# EAGLE board ftdi1 (EAGLE 6.5.0)
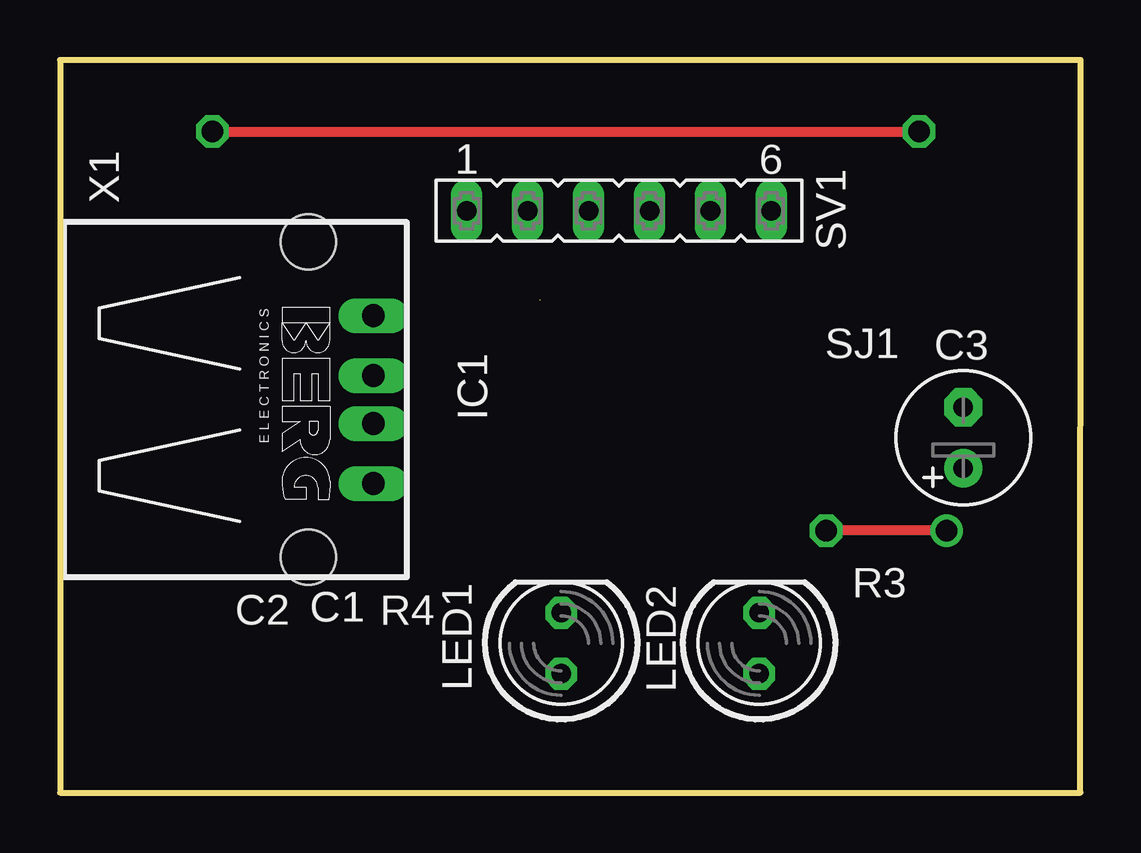
[diagram p0: board, top side]
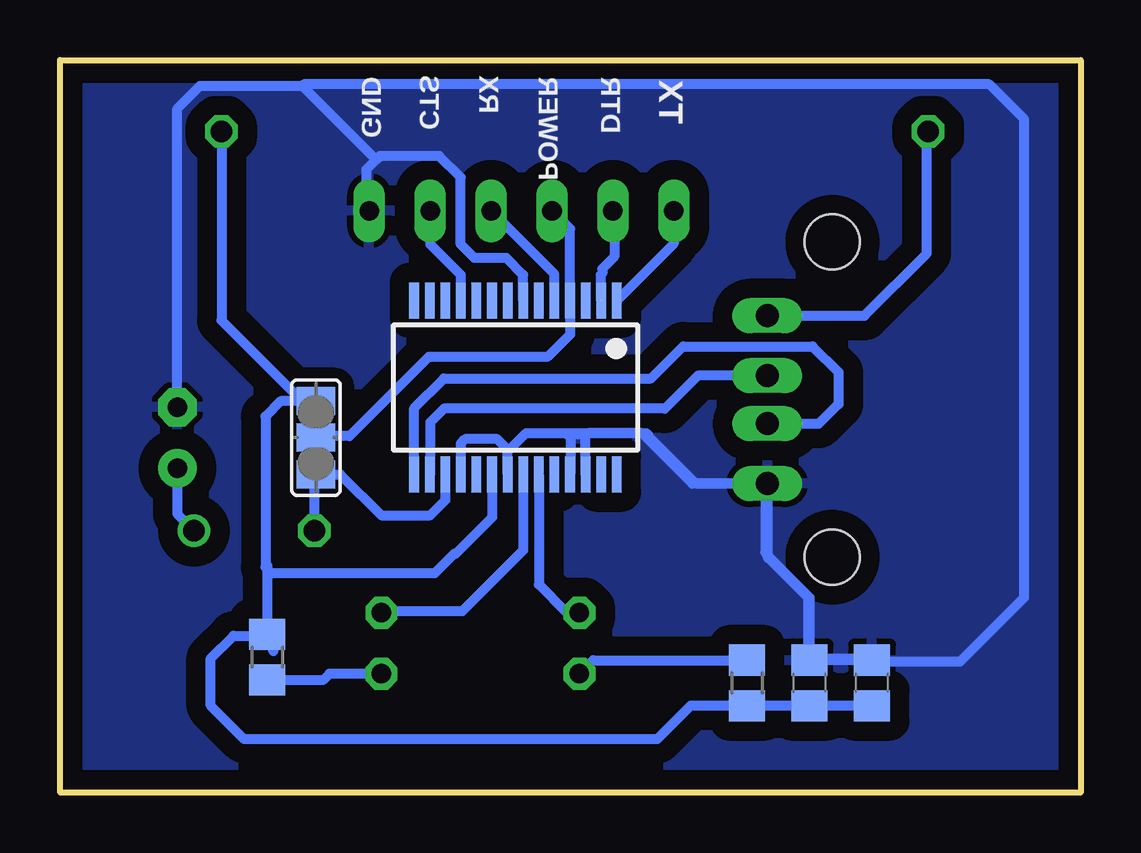
[diagram p1: board, bottom side, seen from below]

Size 42.55 x 30.54 mm. Coordinates in mm from the lower left corner, seen from the top.
Outline: 0,0 42.53,0 42.55,30.54 0,30.54 0,0
Copper layers (1*16): Top 0.035mm / dielectric 1.5mm / Bottom 0.035mm
Design rules "default *": minimum track width 10mil, minimum drill 24mil, track to track 8mil, track to pad 8mil, pad to pad 8mil, via to via 8mil, smd to smd 8mil, copper to edge 12mil, drill to drill 8mil, minimum pad ring 10mil, minimum via ring 8mil, stop-mask expansion 4mil, vias tented up to drill 0mil, thermal gap 10mil

## Footprints (pad centres in the part's own frame; a part is rotated, then mirrored left to right if it is on the bottom)
C0805 = smd 1.3 x 1.5: 1 -0.95,0; 2 0.95,0
E2,5-6 = drill 0.813 pad 1.6: + -1.27,0 | drill 0.813 pad 1.6 octagon: - 1.27,0
SSOP28 = smd 0.4 x 1.5: 1 -4.225,-3.625; 2 -3.575,-3.625; 3 -2.925,-3.625; 4 -2.275,-3.625; 5 -1.625,-3.625; 6 -0.975,-3.625; 7 -0.325,-3.625; 8 0.325,-3.625; 9 0.975,-3.625; 10 1.625,-3.625; 11 2.275,-3.625; 12 2.925,-3.625; 13 3.575,-3.625; 14 4.225,-3.625; 15 4.225,3.625; 16 3.575,3.625; 17 2.925,3.625; 18 2.275,3.625; 19 1.625,3.625; 20 0.975,3.625; 21 0.325,3.625; 22 -0.325,3.625; 23 -0.975,3.625; 24 -1.625,3.625; 25 -2.275,3.625; 26 -2.925,3.625; 27 -3.575,3.625; 28 -4.225,3.625
LED5MM = drill 0.813 octagon: A -1.27,0; K 1.27,0
R0805 = smd 1.3 x 1.5: 1 -0.95,0; 2 0.95,0
SJ_2 = smd 1.168 x 1.6: 1 -1.524,0; 2 0,0; 3 1.524,0
FE06 = drill 0.813 long: 1 -6.35,0; 2 -3.81,0; 3 -1.27,0; 4 1.27,0; 5 3.81,0; 6 6.35,0
PN87520 = drill 0.95 long: 1 -3.5,2.71; 2 -1,2.71; 3 1,2.71; 4 3.5,2.71 | hole 2.3: -6.57,0; 6.57,0

## Placement (x,y rotation side)
C1  10nF  [C0805]  11.3,4.57 90 bottom
C2  10nF  [C0805]  8.7,4.57 90 bottom
C3  10uF  [E2,5-6]  37.66,14.8 90 top
IC1  FT232RL  [SSOP28]  23.56,16.89 180 bottom
LED1  Yellow  [LED5MM]  20.89,6.22 90 top
LED2  Green  [LED5MM]  29.15,6.22 90 top
R3  390R  [R0805]  33.91,5.65 90 bottom
R4  390R  [R0805]  13.91,4.57 270 bottom
SJ1  [SJ_2]  31.88,14.8 270 bottom
SV1  [FE06]  23.3,24.26 0 top
X1  [PN87520]  10.35,16.38 270 top

## Library data of the parts
C1-C3 R3 R4 = rcl
IC1 = ftdichip; MPN: FT232RL; OC_FARNELL: 1146032; OC_NEWARK: 91K9918
LED1 LED2 = led
SJ1 = jumper
SV1 = con-lsta; OC_FARNELL: unknown; OC_NEWARK: unknown
X1 = con-berg; OC_FARNELL: unknown; OC_NEWARK: unknown

## Nets
3.3V: C3.+ IC1.17 SJ1.3
CTS: IC1.11 SV1.5
DTR: IC1.2 SV1.2
GND: C1.2 C2.2 C3.- IC1.7 IC1.18 IC1.21 IC1.25 IC1.26 SV1.6 X1.4
N$1: IC1.23 LED1.K
N$2: IC1.22 LED2.K
N$3: LED2.A R3.1
N$4: LED1.A R4.1
N$7: IC1.16 X1.2
N$8: IC1.15 X1.3
POWER: IC1.4 SJ1.2 SV1.3
RX: IC1.5 SV1.4
TX: IC1.1 SV1.1
VCC: C1.1 C2.1 IC1.20 R3.2 R4.2 SJ1.1 X1.1

## Tracks (layer width: path | path; a pad name or v marks a point on that pad's centre or on a via)
3.3V  (via drill 0.9)
  Top 0.406: v36.96,10.92 v31.94,10.92
  Bottom 0.406: IC1.17 26.48,12.19 27.11,11.56 29.15,11.56 30.86,13.27 SJ1.3 31.94,13.21 v31.94,10.92 | C3.+ 37.66,11.62 v36.96,10.92
CTS
  Bottom 0.406: SV1.5 27.11,22.86 25.84,21.59 25.84,20.53 IC1.11
DTR  (1 unrouted)
  Bottom 0.406: SV1.2 19.43,24.26 19.43,22.35 19.94,21.84 19.94,21.65 20,21.59 20,20.54
GND
  Bottom 0.406: 21.46,14.99 23.11,14.99 23.88,14.22 IC1.21 23.88,14.29 24.32,14.73 25.65,14.73 25.84,14.54 25.84,13.28 IC1.18 | 21.46,14.99 21.27,14.8 | 21.27,14.8 IC1.25 | IC1.26 20.63,14.86 20.57,14.92 | 20.57,14.92 21.14,14.92 21.27,14.8 | IC1.7 23.23,21.58 23.94,22.29 25.27,22.29 25.84,22.86 25.84,25.65 26.73,26.54 29.21,26.54 29.37,26.38 | 29.37,26.38 29.78,25.97 29.78,24.38 SV1.6 | 20.57,14.92 20.51,14.99 18.29,14.99 16.18,12.88 X1.4 13.06,9.89 11.3,8.13 C1.2 C2.2 | C3.- 37.66,28.51 36.7,29.46 32.45,29.46 | 32.45,29.46 29.37,26.38 | 21.46,14.99 18.16,14.99 | 18.16,14.99 18.1,14.99 18.03,14.92 18.1,14.92 | 18.1,14.92 18.16,14.99 | 18.1,14.92 16.07,12.89 13.21,12.89 13.14,12.95 13.14,10.03 13.02,9.91 13.02,9.78 11.37,8.13 11.37,5.59 8.7,5.59 8.57,5.46 5.02,5.46 2.35,8.13 2.35,28.07 3.81,29.53 32.38,29.53 32.45,29.46
  pour Bottom (isolate 0.813): 0.13,30.73 42.61,30.67 42.48,-0.06 0,0
N$1
  Bottom 0.406: IC1.23 22.58,8.68 21.46,7.56 20.95,7.56 LED1.K
N$2
  Bottom 0.406: IC1.22 23.23,10.1 25.78,7.56 29.08,7.56 LED2.K
N$3
  Bottom 0.406: LED2.A 31.3,4.95 31.56,4.7 R3.1
N$4
  Bottom 0.406: LED1.A 20.32,5.52 R4.1
N$7
  Bottom 0.406: X1.2 15.95,17.38 17.34,16 26.54,16 27.11,15.43 27.11,13.29 IC1.16
N$8
  Bottom 0.406: IC1.15 27.78,16.03 26.54,17.27 17.91,17.27 16.57,18.61 11.18,18.61 10.1,17.53 10.1,16.19 10.92,15.37 13.04,15.37 X1.3
POWER
  Bottom 0.406: SJ1.2 31.81,14.86 30.48,14.86 27.18,18.16 22.23,18.16 21.28,19.1 IC1.4 21.28,23.51 SV1.3
RX
  Bottom 0.406: IC1.5 21.93,21.62 SV1.4
TX
  Bottom 0.406: SV1.1 16.95,22.89 IC1.1
VCC  (via drill 0.9)
  Top 0.406: v6.35,27.56 v35.81,27.56
  Bottom 0.406: C2.1 C1.1 R4.2 16.25,3.62 17.65,2.22 34.86,2.22 36.26,3.62 36.26,5.59 35.31,6.54 33.97,6.54 R3.2 | IC1.20 24.53,11.47 26.04,9.97 26.1,9.97 26.92,9.14 33.72,9.14 33.91,9.34 | 33.66,5.9 R3.2 | 33.91,9.46 33.91,9.34 | 33.91,9.34 R3.2 | 8.51,3.43 C2.1 | SJ1.1 32.45,16.32 | 32.45,16.32 33.34,16.32 33.97,15.68 33.97,9.4 33.91,9.34 | 8.63,3.56 C2.1 | X1.1 9.01,19.88 6.41,22.48 6.41,27.5 v6.35,27.56 | v35.81,27.56 35.81,19.68 32.45,16.32

## Text on the board
bNames: TX | DTR | POWER | RX | CTS | GND